# Altium PCB PCB1.PcbDoc (part 2 of 2)
Units mm, origin at the board's own origin, x right, y up, seen from the top; angles counter-clockwise.
Board outline 39 x 39 mm, 4 copper layers (Top Layer, Mid Layer 1, Mid Layer 2, Bottom Layer), stack 1.57 mm thick; 85 components, 70 nets, 394 pads, 166 vias.
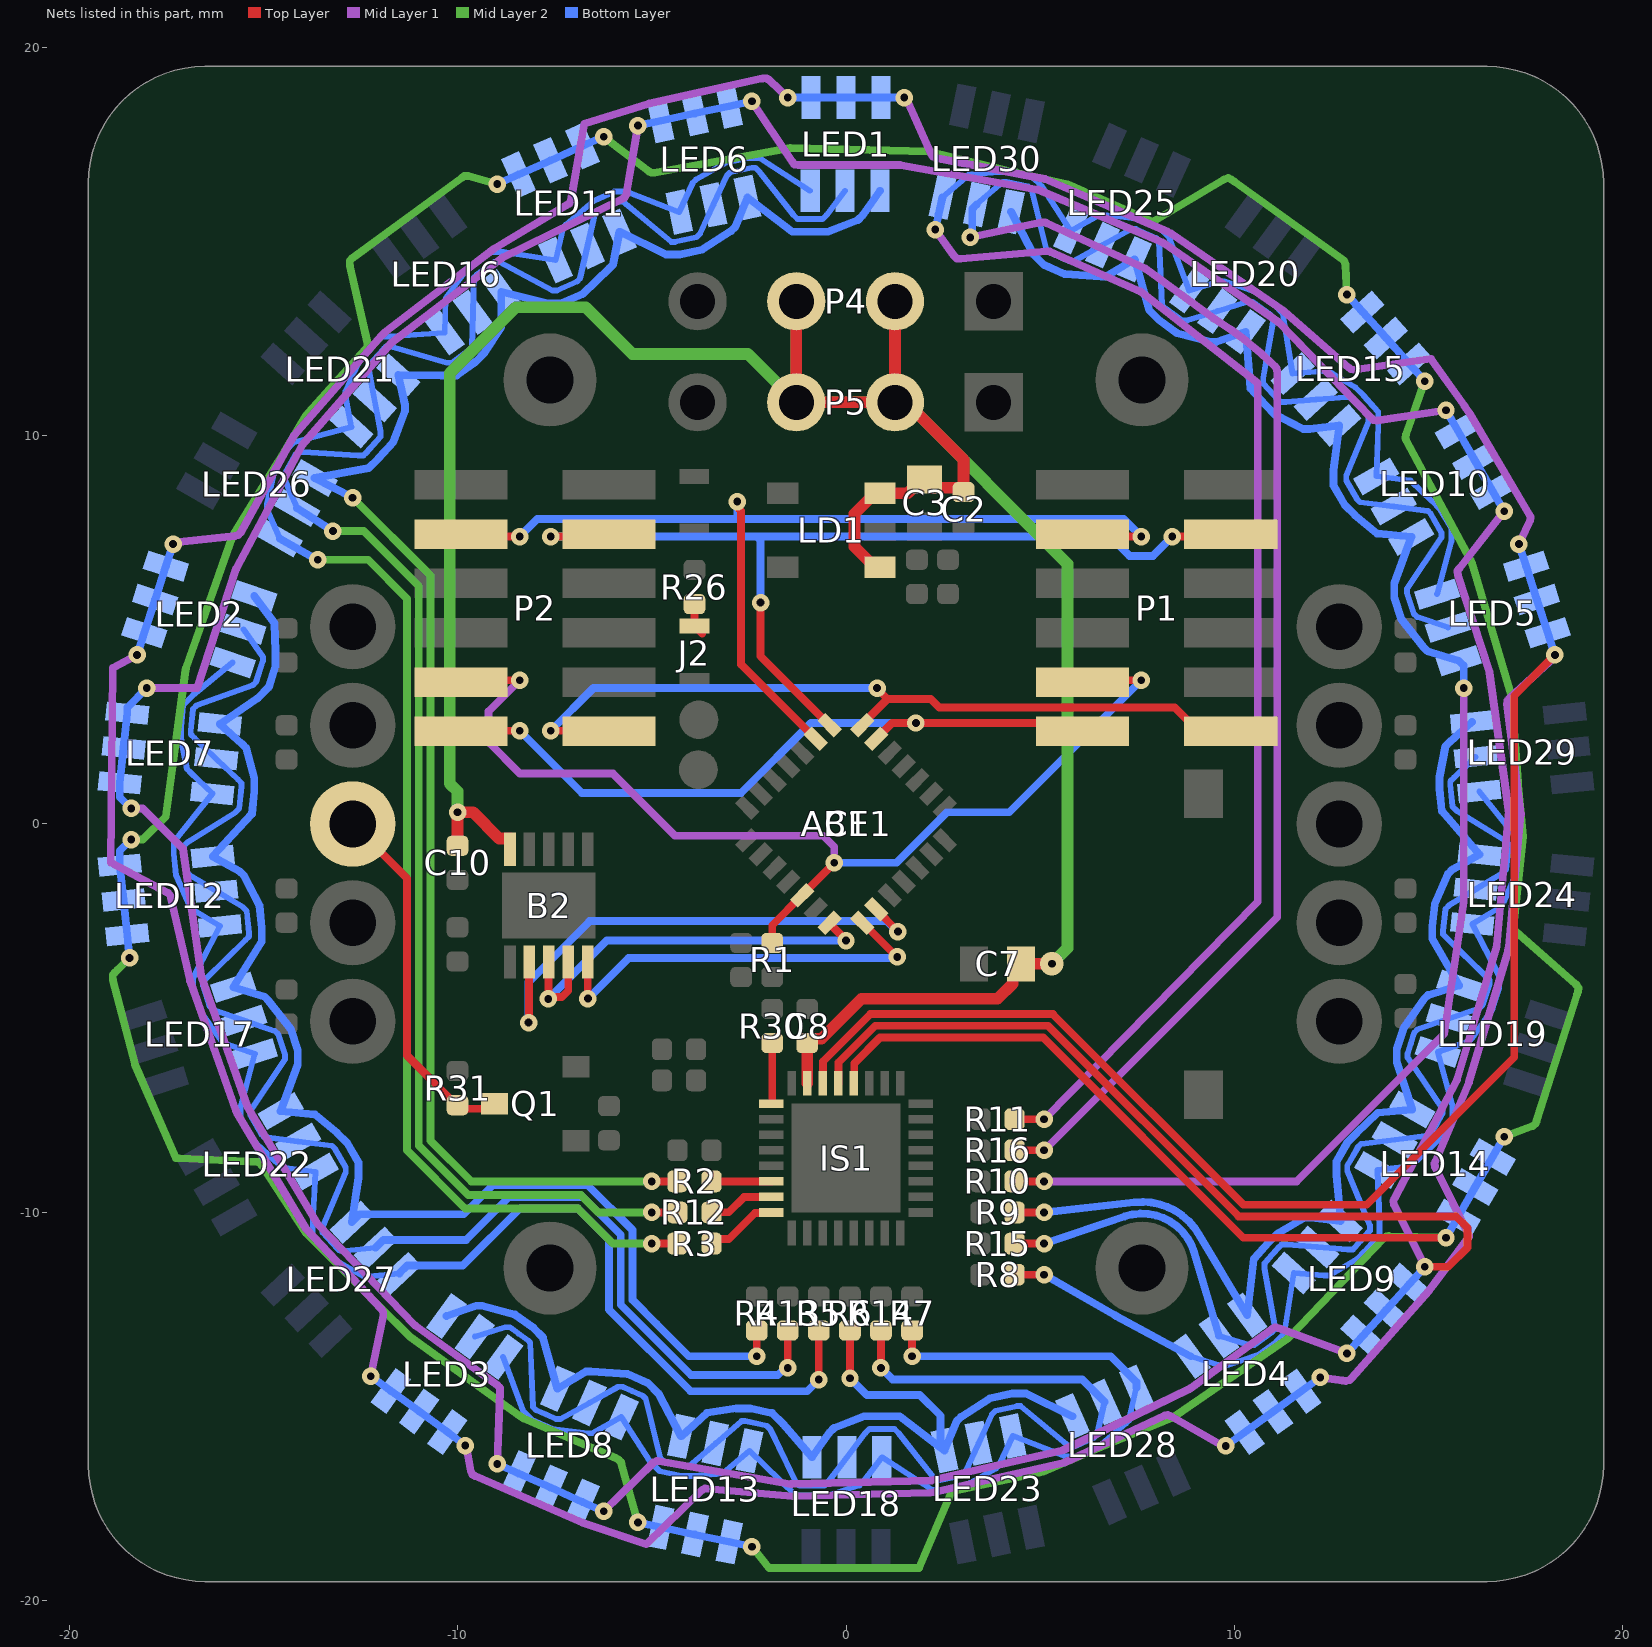
[diagram p4: the nets of this part, all layers, seen from the top]

## Via types
v1: diameter 0.45, hole 0.2, Top Layer to Bottom Layer, 155 vias
v2: diameter 5.8, hole 3.5, Top Layer to Bottom Layer, 4 vias
v3: diameter 0.5, hole 0.2, Top Layer to Bottom Layer, 4 vias
v4: diameter 0.7, hole 0.5, Top Layer to Bottom Layer, 2 vias
v5: diameter 0.6, hole 0.2, Top Layer to Bottom Layer, 1 vias

## Nets (pads, with @x,y where several pads share a name; then routed paths per layer and width w, separated by ;. In a path a pad name is that pad's centre, name@x,y a point inside that pad or via, vN(x,y) a via of type N, cw(c..) or ccw(c..) an arc to the next point about the centre after c; other vN are vias at no path point) (continued)
NetIS1_20: IS1.20 LED11.1 LED11.3 LED11.5 LED12.1 LED12.3 LED12.5 LED13.1 LED13.3 LED13.5 LED14.1 LED14.3 LED14.5 LED15.1 LED15.3 LED15.5 | length 141.2
  Top Layer w0.2: IS1.20@0.2,-6.675 0.21,-6.665 0.21,-6.163 0.877,-5.497 5.076,-5.497 10.229,-10.649 v1(15.445,-10.649)
  Mid Layer 2 w0.2: v1(-18.441,-3.446) -18.759,-3.761 -18.818,-3.819 -18.877,-3.878 -18.877,-3.987 -18.871,-4.012 -18.3,-6.2 -18.294,-6.214 -17.248,-8.602 -17.171,-8.606 -15.125,-8.699 -15.055,-8.768 -15.044,-8.785 -13.902,-10.525 -12.013,-12.414 -11.225,-13.202 -8.372,-15.255 -8.298,-15.302 -5.913,-16.327 -5.846,-16.371 -5.794,-16.423 -5.779,-16.473 v1(-5.355,-17.98) ; v1(-18.4,-0.4) -18.1,-0.4 -17.51,0.19 -17.002,3.952 -16.99,4.016 -15.802,7.385 -15.769,7.445 -14.62,9.312 ; -14.62,9.313 -14.591,9.361 -13.902,10.516 -13.839,10.588 -12.369,12.223 -12.318,12.28 -12.318,12.379 -12.771,14.372 -12.776,14.394 -12.776,14.499 -12.706,14.569 -12.641,14.616 -9.878,16.643 -9.825,16.681 -9.733,16.681 v1(-8.976,16.473) ; v1@-6.238,17.692 -5.084,16.807 -5.069,16.796 -5.01,16.766 -4.931,16.766 -1.498,17.389 -1.433,17.399 2.138,17.309 2.205,17.296 4.336,16.781 ; v1@-2.419,-18.601 -1.978,-19.153 1.876,-19.153 2.691,-17.253 2.749,-17.172 2.824,-17.156 4.974,-16.697 5.067,-16.676 6.304,-16.146 6.355,-16.125 ; 4.337,16.781 4.391,16.768 5.703,16.47 5.791,16.432 7.8,15.54 7.87,15.509 7.964,15.539 9.719,16.586 9.739,16.597 9.839,16.63 9.926,16.585 9.992,16.538 12.773,14.536 12.826,14.498 12.855,14.41 v1@12.89,13.626 ; 6.356,-16.125 8.383,-15.289 8.444,-15.26 11.386,-13.233 11.433,-13.188 13.844,-10.666 13.908,-10.619 13.974,-10.609 13.992,-10.609 15.445,-10.646 v1@15.446,-10.646 ; v1@14.898,11.4 14.413,10.029 14.407,10.011 14.397,9.946 14.422,9.87 16.075,6.799 16.104,6.74 17.123,3.316 17.131,3.248 17.3,1.062 ; v1@16.943,-8.049 17.677,-7.773 17.752,-7.718 17.772,-7.656 18.816,-4.392 18.841,-4.315 18.856,-4.218 18.794,-4.133 18.778,-4.118 17.24,-2.772 17.181,-2.692 17.189,-2.616 17.417,-0.43 17.426,-0.334 17.304,1.006 17.3,1.061
  Bottom Layer w0.2: v1(-18.441,-3.446) LED12.1@-18.503,-2.85 LED12.3@-18.598,-1.955 LED12.5@-18.692,-1.06 -18.692,-0.692 v1(-18.4,-0.4) ; v1(-8.976,16.473) LED11.1@-8.428,16.717 LED11.3@-7.606,17.083 LED11.5@-6.784,17.449 v1(-6.236,17.693) ; v1(-5.355,-17.98) LED13.5@-4.768,-18.104 LED13.3@-3.888,-18.291 LED13.1@-3.008,-18.478 v1(-2.421,-18.603) ; v1(12.893,13.627) LED15.1@13.295,13.182 LED15.3@13.897,12.513 LED15.5@14.499,11.844 v1(14.901,11.398) ; v1(15.445,-10.649) LED14.5@15.745,-10.129 LED14.3@16.195,-9.35 LED14.1@16.645,-8.571 v1(16.945,-8.051)
NetIS1_21: IS1.21 LED6.1 LED6.3 LED6.5 LED7.1 LED7.3 LED7.5 LED8.1 LED8.3 LED8.5 LED9.1 LED9.3 LED9.5 LED10.1 LED10.3 LED10.5 | length 140
  Top Layer w0.2: IS1.21@-0.2,-6.675 -0.19,-6.665 -0.19,-6.137 0.752,-5.195 5.201,-5.195 10.106,-10.1 15.7,-10.1 16,-10.4 16,-10.9 15.502,-11.398 v1(14.9,-11.398)
  Mid Layer 1 w0.2: v1(-18.4,0.4) -18.1,0.4 -17.067,-0.633 -16.6,-3.9 -16.593,-3.919 -15.4,-7.3 -15.39,-7.317 -13.6,-10.3 -13.584,-10.316 -11.111,-12.889 -11.098,-12.901 -11.086,-12.91 -8.974,-14.446 -8.904,-14.516 -8.904,-14.603 -8.904,-14.607 v1(-8.976,-16.473) ; v1(-18,3.5) -16.698,3.5 -15.704,6.554 -15.699,6.569 -15.691,6.584 -14.009,9.732 -13.998,9.751 -11.715,12.375 -11.702,12.39 -8.855,14.57 -8.839,14.582 -5.757,16.094 -5.697,16.124 -5.653,16.21 v1(-5.355,17.979) ; v1(-6.236,-17.693) -4.955,-16.437 -4.868,-16.393 -4.803,-16.404 -1.421,-16.993 -1.401,-16.992 2.184,-16.902 2.204,-16.898 5.593,-16.117 5.614,-16.107 8.824,-14.55 8.84,-14.542 8.853,-14.533 10.966,-12.999 11.054,-12.954 11.137,-12.981 11.14,-12.982 v1(12.893,-13.627) ; v1(-2.421,18.603) -1.382,17.051 -1.38,17.048 -1.329,16.977 -1.232,16.962 1.38,16.961 1.396,16.961 1.413,16.958 4.926,16.331 4.948,16.327 8.149,14.966 8.168,14.958 11.121,12.924 11.137,12.912 13.528,10.448 13.574,10.401 13.67,10.385 v1(15.445,10.649) ; v1(14.9,-11.398) 14.101,-9.792 14.086,-9.696 14.117,-9.637 15.722,-6.602 15.728,-6.583 16.75,-3.146 16.751,-3.126 17.057,0.339 17.054,0.361 16.565,3.896 16.562,3.914 16.557,3.929 15.751,6.413 15.736,6.51 15.787,6.58 15.789,6.583 v1(16.945,8.051)
  Bottom Layer w0.2: v1(-18.4,0.4) -18.692,0.692 LED7.1@-18.692,1.06 LED7.3@-18.598,1.955 LED7.5@-18.503,2.85 -18.503,2.997 v1(-18,3.5) ; v1(-8.976,-16.473) LED8.5@-8.428,-16.717 LED8.3@-7.606,-17.083 LED8.1@-6.784,-17.449 v1(-6.236,-17.693) ; v1(-5.355,17.979) LED6.1@-4.768,18.104 LED6.3@-3.888,18.291 LED6.5@-3.008,18.478 v1(-2.421,18.603) ; v1(12.893,-13.627) LED9.5@13.295,-13.182 LED9.3@13.897,-12.513 LED9.1@14.499,-11.844 v1(14.9,-11.398) ; v1(15.445,10.649) LED10.1@15.745,10.129 LED10.3@16.195,9.35 LED10.5@16.645,8.571 v1(16.945,8.051)
NetIS1_22: IS1.22 LED1.1 LED1.3 LED1.5 LED2.1 LED2.3 LED2.5 LED3.1 LED3.3 LED3.5 LED4.1 LED4.3 LED4.5 LED5.1 LED5.3 LED5.5 | length 156.2
  Top Layer w0.2: IS1.22@-0.6,-6.675 -0.59,-6.665 -0.59,-6.11 0.627,-4.894 5.326,-4.894 10.231,-9.798 13.402,-9.798 17.2,-6 17.2,3.304 v1(18.248,4.352)
  Mid Layer 1 w0.2: v1(-18.248,4.352) -18.875,4.013 -18.927,-0.996 -17.454,-1.771 -17.392,-1.833 -17.379,-1.889 -16.884,-4.042 -15.702,-7.384 -15.662,-7.465 -13.902,-10.421 -11.946,-12.509 -11.91,-12.58 -11.91,-12.649 -11.914,-12.669 v1(-12.236,-14.213) ; v1@-17.299,7.244 -15.73,7.416 -15.71,7.419 -15.645,7.44 -15.588,7.496 -14.207,10.001 -11.939,12.588 -11.874,12.651 -9.062,14.809 -7.167,15.945 -7.118,15.975 -7.078,16.053 -6.74,18.021 -5.076,18.543 cw(c-5.016,18.352) -5.059,18.547 -2.145,19.192 cw(c-2.101,18.997) -1.964,19.142 ; v1@-9.778,-16.01 -9.673,-16.584 -9.659,-16.663 -9.613,-16.753 -9.547,-16.781 -6.789,-17.982 -6.782,-17.985 -6.553,-18.065 -5.14,-18.541 -3.709,-17.147 -3.631,-17.108 -3.574,-17.113 -1.373,-17.307 2.17,-17.215 2.26,-17.202 5.616,-16.442 8.205,-15.227 8.284,-15.215 8.349,-15.236 8.367,-15.246 v1@9.737,-16.029 ; -1.963,19.141 v1(-1.5,18.7) ; v1@1.544,18.691 2.192,17.252 2.201,17.234 2.241,17.178 2.312,17.142 5.121,16.602 8.283,15.245 8.363,15.203 11.284,13.195 12.95,11.744 12.993,11.706 13.08,11.692 15.056,11.979 15.92,10.763 16.058,10.563 16.062,10.557 17.588,7.965 17.624,7.903 17.608,7.803 17.574,7.731 v1(17.321,7.205) ; v1(12.205,-14.247) 12.784,-14.324 12.863,-14.335 12.962,-14.319 13.01,-14.265 15.004,-12.014 15.008,-12.008 15.156,-11.815 16.045,-10.618 15.162,-8.826 15.148,-8.74 15.171,-8.687 16.036,-6.654 17.043,-3.256 17.058,-3.166 17.372,0.26 17.017,3.098 17.03,3.177 17.07,3.232 17.085,3.246 v1@18.253,4.307
  Bottom Layer w0.2: v1(-18.248,4.352) LED2.1@-18.063,4.923 LED2.3@-17.785,5.779 LED2.5@-17.507,6.635 v1(-17.321,7.205) ; v1(-12.236,-14.213) LED3.5@-11.716,-14.592 LED3.3@-10.988,-15.121 LED3.1@-10.26,-15.65 v1(-9.8,-16) ; v1(-1.5,18.7) LED1.1@-0.9,18.7 LED1.3@0,18.7 LED1.5@0.9,18.7 v1(1.5,18.7) ; v1(9.778,-16.01) LED4.5@10.263,-15.658 LED4.3@10.992,-15.129 LED4.1@11.72,-14.6 v1(12.205,-14.247) ; v1(17.321,7.205) LED5.1@17.507,6.635 LED5.3@17.785,5.779 LED5.5@18.063,4.923 v1(18.248,4.352)
NetIS1_25: IS1.25 R30.1 | length 1.6
  Top Layer w0.2: IS1.25@-1.925,-7.2 -1.91,-7.2 -1.9,-7.19 R30.1@-1.9,-5.64
NetIS1_30: IS1.30 R2.1 | length 1.5
  Top Layer w0.2: R2.1@-3.46,-9.2 IS1.30@-1.925,-9.2
NetIS1_31: IS1.31 R12.1 | length 1.7
  Top Layer w0.2: R12.1@-3.46,-10 -3.454,-9.994 -3.017,-9.994 -2.623,-9.6 IS1.31@-1.925,-9.6
NetIS1_32: IS1.32 R3.1 | length 1.9
  Top Layer w0.2: R3.1@-3.46,-10.8 -3.346,-10.686 -3.016,-10.686 -2.34,-10.01 -1.935,-10.01 IS1.32@-1.925,-10
NetJ2_2: J2.2 R26.1 | length 1.6
  Top Layer w0.2: J2.2@-3.9,5.097 J2.2@-3.9,5.1 ; -3.7,4.9 J2.2@-3.9,5.1 ; J2.2@-3.9,5.1 R26.1@-3.9,5.66 -3.9,5.76 J2.2@-3.9,5.1
NetLED1_2: LED1.2 LED6.2 LED11.2 LED16.2 LED21.2 LED26.2 R3.2 | length 47.3
  Top Layer w0.2: v1(-5,-10.8) R3.2@-4.34,-10.8
  Mid Layer 2 w0.2: v1(-13.6,6.8) -12.3,6.8 -11.3,5.8 -11.3,-8.4 -9.8,-9.9 -6.9,-9.9 -6,-10.8 v1(-5,-10.8)
  Bottom Layer w0.15: LED26.2@-14.579,7.349 -14.907,8.114 -14.907,8.234 -14.708,9.118 -14.423,9.612 -14.207,9.827 LED21.2@-12.732,10.219 -12.883,10.997 -12.883,11.138 -12.532,11.911 -12.149,12.337 -11.947,12.539 LED16.2@-10.329,12.643 -10.303,13.543 -9.827,14.177 -9.618,14.386 -9.156,14.721 -8.817,14.721 LED11.2@-7.475,14.515 -7.281,15.355 -7.206,15.429 -6.488,16.047 -5.968,16.279 -5.648,16.279 LED6.2@-4.294,15.751 -3.949,16.498 -3.86,16.586 -3.084,17.025 -2.526,17.144 -2.226,17.144 LED1.2@-0.925,16.3
  Bottom Layer w0.2: LED26.2@-14.579,7.349 v1(-13.6,6.8)
NetLED1_4: LED1.4 LED6.4 LED11.4 LED16.4 LED21.4 LED26.4 R12.2 | length 50.1
  Top Layer w0.2: v1(-5,-10) R12.2@-4.34,-10
  Mid Layer 2 w0.2: v1(-13.207,7.541) -12.414,7.541 -11.675,6.802 -10.998,6.125 -10.998,-8.275 -9.723,-9.55 -6.823,-9.55 -6.373,-10 v1(-5,-10)
  Bottom Layer w0.15: LED26.4@-14.129,8.128 -14.457,8.893 -14.457,9.014 -14.171,9.508 -14.103,9.576 -13.983,9.576 -12.559,9.489 -12.418,9.489 -12.363,9.544 -11.98,9.969 -11.98,10.11 LED21.4@-12.13,10.888 -12.28,11.666 -12.28,11.807 -11.897,12.232 -11.842,12.287 -11.701,12.287 -10.281,11.875 -10.151,11.875 -9.689,12.211 -9.627,12.272 LED16.4@-9.601,13.172 -9.575,14.072 -9.514,14.134 -9.051,14.47 -8.921,14.47 -7.553,13.734 -7.442,13.734 -6.921,13.966 -6.846,14.041 LED11.4@-6.653,14.881 -6.459,15.721 -6.384,15.795 -5.863,16.027 -5.753,16.027 -4.497,14.985 -4.405,14.985 -3.847,15.104 -3.758,15.192 LED6.4@-3.413,15.939 -3.069,16.685 -2.98,16.774 -2.421,16.892 -2.33,16.892 -2.241,16.804 -1.352,15.677 -1.248,15.573 -0.602,15.573 -0.498,15.677 LED1.4@-0.025,16.3
  Bottom Layer w0.2: LED26.4@-14.129,8.128 v1(-13.207,7.541)
NetLED1_6: LED1.6 LED6.6 LED11.6 LED16.6 LED21.6 LED26.6 R2.2 | length 45.9
  Top Layer w0.2: v1(-5,-9.2) R2.2@-4.34,-9.2
  Mid Layer 2 w0.2: v1(-12.7,8.4) -10.697,6.397 -10.697,-8.15 -9.647,-9.2 v1(-5,-9.2)
  Bottom Layer w0.2: v1(-12.7,8.4) LED26.6@-13.679,8.908 -12.282,9.162 -12.043,9.402 -11.653,9.835 -11.352,10.629 -11.352,10.79 LED21.6@-11.528,11.557 -10.417,11.548 -10.018,11.548 -9.547,11.89 -9.3,12.138 -8.874,12.791 LED16.6@-8.873,13.701 -7.688,13.407 -7.312,13.407 -6.782,13.643 -6.084,14.311 -5.999,14.396 LED11.6@-5.83,15.247 -4.632,14.658 -4.278,14.658 -3.71,14.779 -2.954,15.268 -2.853,15.369 LED6.6@-2.533,16.126 -1.383,15.247 -0.467,15.247 0.309,15.548 0.427,15.666 LED1.6@0.875,16.3
NetLED2_2: LED2.2 LED7.2 LED12.2 LED17.2 LED22.2 LED27.2 R5.2 | length 37.2
  Top Layer w0.2: v1(-0.7,-14.3) R5.2@-0.7,-13.04
  Bottom Layer w0.15: LED2.2@-15.788,4.157 -16.817,3.308 -17.061,3.065 -17.121,2.496 -17.121,2.206 -16.963,1.415 -16.867,1.319 LED7.2@-16.307,0.784 -17.303,-0.465 -17.303,-0.756 -17.244,-1.325 -16.898,-2.115 -16.802,-2.211 LED12.2@-16.114,-2.624 -16.801,-3.957 -16.801,-4.266 -16.625,-4.809 -16.095,-5.561 -16.014,-5.642 LED17.2@-15.217,-5.914 -15.583,-7.273 -15.583,-7.602 -15.298,-8.096 -15.082,-8.312 -14.528,-8.84 LED22.2@-13.654,-8.951 -13.725,-10.266 -13.725,-10.617 -13.334,-11.036 -13.133,-11.238 -12.415,-11.644 -12.273,-11.644 LED27.2@-11.497,-11.568
  Bottom Layer w0.2: LED27.2@-11.497,-11.568 -11.292,-11.363 -9.863,-11.363 -8.4,-9.9 -6.9,-9.9 -6.1,-10.7 -6.1,-12.5 -4,-14.6 -1,-14.6 v1(-0.7,-14.3)
NetLED2_4: LED2.4 LED7.4 LED12.4 LED17.4 LED22.4 LED27.4 R13.2 | length 39.6
  Top Layer w0.2: v1(-1.5,-14) R13.2@-1.5,-13.04
  Bottom Layer w0.15: LED2.4@-15.51,5.013 -15.011,4.298 -15.011,4.197 -15.187,3.655 -15.269,3.573 -16.713,3.057 -16.809,2.961 -16.869,2.392 -16.869,2.31 -16.773,2.214 LED7.4@-16.213,1.679 -15.654,1.144 -15.558,1.048 -15.558,0.966 -15.617,0.397 -15.713,0.301 -16.956,-0.473 -17.052,-0.569 -17.052,-0.652 -16.992,-1.22 -16.896,-1.316 LED12.4@-16.208,-1.729 -15.52,-2.141 -15.424,-2.237 -15.364,-2.806 -15.364,-2.888 -15.46,-2.984 -16.468,-3.979 -16.55,-4.061 -16.55,-4.162 -16.373,-4.705 -16.292,-4.786 LED17.4@-15.495,-5.058 -14.698,-5.33 -14.616,-5.412 -14.44,-5.954 -14.44,-6.055 -15.332,-7.378 -15.332,-7.498 -15.046,-7.992 -14.978,-8.06 LED22.4@-14.104,-8.172 -13.229,-8.283 -13.161,-8.351 -12.876,-8.845 -12.876,-8.966 -13.473,-10.371 -13.473,-10.513 -13.083,-10.932 -13.029,-10.986 -12.886,-10.986 LED27.4@-12.11,-10.91
  Bottom Layer w0.2: LED27.4@-12.11,-10.91 -11.906,-10.705 -9.774,-10.705 -8.667,-9.598 -6.775,-9.598 -5.798,-10.575 -5.798,-12.375 -3.987,-14.186 -1.754,-14.186 -1.568,-14 v1(-1.5,-14)
NetLED2_6: LED2.6 LED7.6 LED12.6 LED17.6 LED22.6 LED27.6 R4.2 | length 35
  Top Layer w0.2: v1(-2.3,-13.7) R4.2@-2.3,-13.04
  Bottom Layer w0.2: LED2.6@-15.232,5.869 -14.708,5.165 -14.685,4.433 -14.685,4.068 -14.864,3.516 -15.134,3.246 LED7.6@-16.119,2.574 -15.548,2.063 -15.439,1.954 -15.231,1.183 -15.231,0.84 -15.292,0.261 LED12.6@-16.302,-0.834 -15.604,-1.221 -15.494,-1.33 -15.099,-2.101 -15.038,-2.679 -15.038,-3.023 LED17.6@-15.773,-4.202 -14.965,-4.449 -14.872,-4.542 -14.292,-5.273 -14.113,-5.825 -14.113,-6.19 LED22.6@-14.554,-7.392 -13.669,-7.479 -13.094,-7.956 -12.839,-8.211 -12.549,-8.714 -12.549,-9.101 LED27.6@-12.724,-10.251 -12.519,-10.047 -9.84,-10.047 -9.09,-9.297 -6.65,-9.297 -5.497,-10.45 -5.497,-12.25 -4.873,-12.873 -4.047,-13.7 v1(-2.3,-13.7)
NetLED3_2: LED3.2 LED8.2 LED13.2 LED18.2 LED23.2 LED28.2 R7.2 | length 28.2
  Top Layer w0.2: v1(1.7,-13.7) R7.2@1.7,-13.04
  Bottom Layer w0.15: LED3.2@-8.829,-13.723 -8.309,-15.113 -8.087,-15.335 -7.566,-15.567 -6.64,-15.682 -6.529,-15.682 LED8.2@-5.785,-15.267 -5.032,-16.425 -4.796,-16.661 -4.237,-16.78 -3.937,-16.78 -3.161,-16.716 LED13.2@-2.484,-16.136 -1.302,-17.278 -0.448,-17.278 0.348,-17.027 0.452,-16.923 LED18.2@0.925,-16.3 2.226,-17.144 2.526,-17.144 3.084,-17.025 3.86,-16.586 3.949,-16.498 LED23.2@4.294,-15.751 5.648,-16.279 5.968,-16.279 6.488,-16.047 7.206,-15.429 7.281,-15.355 LED28.2@7.475,-14.515
  Bottom Layer w0.2: v1(1.7,-13.7) 6.812,-13.7 7.475,-14.363 LED28.2@7.475,-14.515
NetLED3_4: LED3.4 LED8.4 LED13.4 LED18.4 LED23.4 LED28.4 R14.2 | length 31.5
  Top Layer w0.2: v1(0.9,-14) R14.2@0.9,-13.04
  Bottom Layer w0.15: LED3.4@-9.557,-13.194 -8.781,-12.955 -8.65,-12.955 -8.435,-13.111 -8.188,-13.291 -8.127,-13.352 -8.058,-15.009 -7.983,-15.084 -7.732,-15.196 -7.462,-15.316 -7.351,-15.316 LED8.4@-6.607,-14.901 -5.863,-14.486 -5.752,-14.486 -5.509,-14.595 -5.231,-14.718 -5.156,-14.793 -4.78,-16.321 -4.692,-16.41 -4.133,-16.528 -4.042,-16.528 LED13.4@-3.365,-15.949 -2.688,-15.37 -2.596,-15.37 -2.266,-15.44 -2.037,-15.488 -1.949,-15.577 -1.302,-16.923 -1.198,-17.027 -0.552,-17.027 -0.448,-16.923 LED18.4@0.025,-16.3 0.498,-15.677 0.602,-15.573 1.248,-15.573 1.352,-15.677 2.241,-16.804 2.33,-16.892 2.421,-16.892 2.98,-16.774 3.069,-16.685 LED23.4@3.413,-15.939 3.758,-15.192 3.847,-15.104 4.405,-14.985 4.497,-14.985 5.753,-16.027 5.863,-16.027 6.384,-15.795 6.459,-15.721 LED28.4@6.653,-14.881
  Bottom Layer w0.2: v1(0.9,-14) 1.2,-14.3 6.079,-14.3 6.653,-14.873 LED28.4@6.653,-14.881
NetLED3_6: LED3.6 LED8.6 LED13.6 LED18.6 LED23.6 LED28.6 R6.2 | length 25.6
  Top Layer w0.2: R6.2@0.1,-13.04 0.103,-13.043 v1(0.103,-14.266)
  Bottom Layer w0.2: LED3.6@-10.285,-12.665 -9.519,-12.401 -9.37,-12.401 -8.517,-12.628 -8.047,-12.97 -7.8,-13.217 LED8.6@-7.429,-14.535 -6.695,-14.095 -6.569,-14.095 -5.622,-14.16 -5.092,-14.396 -4.829,-14.658 LED13.6@-4.245,-15.762 -3.578,-15.157 -2.823,-15.043 -2.468,-15.043 -1.9,-15.164 -1.622,-15.442 LED18.6@-0.875,-16.3 -0.427,-15.666 -0.309,-15.548 0.467,-15.247 1.383,-15.247 2.425,-16.043 LED23.6@2.533,-16.126 ; v1(0.103,-14.266) 0.537,-14.7 1.9,-14.7 2.436,-15.236 2.436,-16.028 LED23.6@2.533,-16.126 ; LED28.6@5.83,-15.247 4.632,-14.658 4.278,-14.658 3.71,-14.779 2.954,-15.268 2.853,-15.369 LED23.6@2.533,-16.126
NetLED4_2: LED4.2 LED9.2 LED14.2 LED19.2 LED24.2 LED29.2 R9.2 | length 27.9
  Top Layer w0.2: R9.2@4.34,-10 v1(5.1,-10)
  Bottom Layer w0.2: v1(5.1,-10) 7.428,-9.738 cw(c7.62,-11.43) 9.083,-10.558 LED4.2@10.329,-12.643 10.499,-11.192 10.882,-10.767 11.099,-10.55 11.805,-10.133 11.966,-10.133 LED9.2@12.732,-10.219 12.624,-9.037 12.624,-8.687 12.909,-8.193 13.14,-7.963 13.694,-7.435 LED14.2@14.579,-7.349 14.178,-6.125 14.178,-5.794 14.355,-5.252 14.887,-4.497 14.981,-4.404 LED19.2@15.788,-4.157 15.093,-2.953 15.093,-2.641 15.153,-2.073 15.499,-1.281 15.609,-1.171 LED24.2@16.307,-0.784 15.336,0.332 15.276,0.901 15.276,1.212 15.433,2.003 15.543,2.113 LED29.2@16.114,2.624
NetLED4_4: LED4.4 LED9.4 LED14.4 LED19.4 LED24.4 LED29.4 R15.2 | length 31.9
  Top Layer w0.2: R15.2@4.34,-10.8 v1(5.1,-10.8)
  Bottom Layer w0.15: LED4.4@9.601,-13.172 10.377,-13.412 10.508,-13.412 10.829,-13.178 10.97,-13.076 11.031,-13.014 11.031,-12.884 10.775,-11.448 10.775,-11.307 10.974,-11.086 11.158,-10.882 11.213,-10.827 11.354,-10.827 LED9.4@12.13,-10.888 12.906,-10.95 13.047,-10.95 13.102,-10.895 13.243,-10.738 13.485,-10.469 13.485,-10.329 12.901,-8.922 12.901,-8.802 12.995,-8.639 13.186,-8.308 13.254,-8.24 LED14.4@14.129,-8.128 15.003,-8.017 15.071,-7.949 15.18,-7.761 15.357,-7.455 15.357,-7.334 14.455,-6.01 14.455,-5.909 14.54,-5.648 14.631,-5.367 14.713,-5.285 LED19.4@15.51,-5.013 16.307,-4.742 16.389,-4.66 16.565,-4.117 16.565,-4.016 16.483,-3.935 15.465,-2.934 15.37,-2.838 15.37,-2.756 15.429,-2.187 15.525,-2.091 LED24.4@16.213,-1.679 16.901,-1.267 16.997,-1.171 17.057,-0.602 17.057,-0.52 16.961,-0.424 15.708,0.351 15.612,0.447 15.552,1.015 15.552,1.098 15.648,1.194 LED29.4@16.208,1.729
  Bottom Layer w0.2: v1(5.1,-10.8) 7.171,-10.102 cw(c7.62,-11.43) 8.964,-11.032 LED4.4@9.601,-13.172
NetLED4_6: LED4.6 LED9.6 LED14.6 LED19.6 LED24.6 LED29.6 R8.2 | length 26.4
  Top Layer w0.2: R8.2@4.34,-11.6 v1(5.1,-11.6)
  Bottom Layer w0.15: LED4.6@8.873,-13.701 9.649,-13.941 9.78,-13.941 10.612,-13.663 11.074,-13.328 11.283,-13.119 LED9.6@11.528,-11.557 12.304,-11.619 12.445,-11.619 13.151,-11.201 13.353,-10.999 13.736,-10.574 13.736,-10.224 LED14.6@13.679,-8.908 14.553,-8.796 15.107,-8.269 15.323,-8.053 15.608,-7.559 15.608,-7.23 LED19.6@15.232,-5.869 16.029,-5.598 16.111,-5.516 16.64,-4.764 16.817,-4.222 16.817,-3.912 LED24.6@16.119,-2.574 16.807,-2.162 16.903,-2.066 17.249,-1.275 17.309,-0.706 17.309,-0.415 LED29.6@16.302,0.834
  Bottom Layer w0.2: v1(5.1,-11.6) 6.922,-12.646 ccw(c7.62,-11.43) 6.953,-12.663 LED4.6@8.873,-13.701
NetLED5_2: LED5.2 LED10.2 LED15.2 LED20.2 LED25.2 LED30.2 R11.2 | length 53.8
  Top Layer w0.2: R11.2@4.34,-7.6 v1(5.1,-7.6)
  Mid Layer 1 w0.2: v1(2.3,15.3) 2.776,14.634 2.785,14.621 2.856,14.55 2.947,14.55 5.176,14.744 5.227,14.744 5.265,14.727 7.577,13.71 ; v1(5.1,-7.6) 10.6,-1.996 10.6,11.343 7.62,13.684
  Bottom Layer w0.15: LED30.2@2.484,16.136 3.161,16.716 3.937,16.78 4.237,16.78 4.796,16.661 5.032,16.425 LED25.2@5.785,15.267 6.529,15.682 6.64,15.682 7.566,15.567 8.087,15.335 8.309,15.113 LED20.2@8.833,13.731 9.609,13.97 9.739,13.97 10.571,13.693 11.034,13.357 11.243,13.148 LED15.2@11.494,11.594 12.27,11.656 12.411,11.656 13.118,11.239 13.32,11.036 13.703,10.611 13.703,10.261 LED10.2@13.654,8.951 14.528,8.84 15.082,8.312 15.298,8.096 15.583,7.602 15.583,7.273 LED5.2@15.216,5.917
  Bottom Layer w0.2: v1(2.3,15.3) 2.384,15.697 LED30.2@2.484,16.136
NetLED5_4: LED5.4 LED10.4 LED15.4 LED20.4 LED25.4 LED30.4 R16.2 | length 57.8
  Top Layer w0.2: R16.2@4.34,-8.4 v1(5.1,-8.4)
  Mid Layer 1 w0.2: v1(3.2,15.1) 5.035,15.486 cw(c5.076,15.291) 5.16,15.472 7.682,14.308 cw(c7.598,14.127) 7.716,14.288 9.481,13.006 ; v1(5.1,-8.4) 11.1,-2.4 11.1,11.642 ccw(c10.9,11.642) 11.041,11.783 ccw(c4.79,5.415) 9.481,13.006 ; 9.459,13.014 9.481,13.006
  Bottom Layer w0.15: LED30.4@3.365,15.949 4.042,16.528 4.133,16.528 4.692,16.41 4.78,16.321 5.156,14.793 5.231,14.718 5.752,14.486 5.863,14.486 LED25.4@6.607,14.901 7.351,15.316 7.462,15.316 7.983,15.084 8.058,15.009 8.13,13.36 8.192,13.298 8.654,12.962 8.785,12.962 LED20.4@9.561,13.202 10.337,13.441 10.467,13.441 10.929,13.105 10.991,13.044 10.991,12.913 10.742,11.485 10.742,11.344 11.125,10.919 11.18,10.864 11.321,10.864 LED15.4@12.097,10.925 12.872,10.987 13.013,10.987 13.068,10.932 13.451,10.507 13.451,10.366 12.876,8.966 12.876,8.845 13.161,8.351 13.229,8.283 LED10.4@14.104,8.172 14.978,8.06 15.046,7.992 15.332,7.498 15.332,7.378 14.439,6.058 14.439,5.957 14.616,5.414 14.697,5.332 LED5.4@15.494,5.061
  Bottom Layer w0.2: v1(3.2,15.1) 3.248,15.148 3.248,15.832 LED30.4@3.365,15.949
NetLED5_6: LED5.6 LED10.6 LED15.6 LED20.6 LED25.6 LED30.6 R10.2 | length 43
  Top Layer w0.2: R10.2@4.34,-9.2 v1(5.1,-9.2)
  Mid Layer 1 w0.2: v1(5.1,-9.2) 11.6,-9.2 15.4,-5.4 15.9,-2 v1(15.9,3.5)
  Bottom Layer w0.2: LED30.6@4.245,15.762 4.829,14.658 5.092,14.396 5.622,14.16 6.569,14.095 6.695,14.095 LED25.6@7.429,14.535 7.804,13.224 8.051,12.977 8.521,12.636 9.374,12.408 9.523,12.408 LED20.6@10.289,12.673 10.415,11.21 10.805,10.777 11.044,10.537 11.772,10.17 11.932,10.17 LED15.6@12.699,10.257 12.549,9.101 12.549,8.714 12.839,8.211 13.094,7.956 13.669,7.479 LED10.6@14.554,7.392 14.113,6.193 14.113,5.828 14.292,5.276 14.872,4.545 14.965,4.451 LED5.6@15.773,4.205 15.9,4.077 v1(15.9,3.5)
R\E\S\E\T\: B1.5 P1.9 P2.9 R1.2 | length 28
  Top Layer w0.2: P2.9@-9.911,3.654 -9.865,3.7 v1(-8.4,3.7) ; R1.2@-1.9,-3.06 -1.9,-2.607 B1.5@-1.131,-1.838 -1.131,-1.835 -0.3,-1.004 v1(-0.3,-1) ; P1.9@6.091,3.654 6.137,3.7 v1(7.6,3.7)
  Mid Layer 1 w0.2: v1(-8.4,3.7) -9.2,2.9 -9.2,2.1 -8.4,1.3 -6,1.3 -4.4,-0.3 -0.587,-0.3 -0.3,-0.587 v1(-0.3,-1)
  Bottom Layer w0.2: v1(-0.3,-1) 1.3,-1 2.6,0.3 4.2,0.3 v1(7.6,3.7)
RS485_DE: B1.7 B2.3 B2.4 | length 11.2
  Top Layer w0.2: v1(-7.663,-4.503) v1@-7.656,-4.497 ; B2.3@-7.65,-3.55 -7.656,-3.556 v1@-7.656,-4.497 ; B2.4@-7.15,-3.55 -7.15,-4.288 -7.317,-4.455 -7.615,-4.455 v1@-7.656,-4.497 ; B1.7@-0.424,-2.546 -0.424,-2.561 0,-2.985 v1(0,-3)
  Bottom Layer w0.2: v1(-7.663,-4.503) -6.16,-3 v1(0,-3)
RS485_RX: B1.9 B2.2 | length 13.6
  Top Layer w0.2: v1@-8.17,-5.011 -8.16,-5 -8.16,-3.56 B2.2@-8.15,-3.55 ; B1.9@0.778,-2.192 0.778,-2.201 1.336,-2.76 v1(1.336,-2.769)
  Bottom Layer w0.2: v1(-8.17,-5.111) -8.17,-4.07 -6.6,-2.5 1.046,-2.5 1.315,-2.769 v1(1.336,-2.769)
RS485_TX: B1.8 B2.5 | length 10.6
  Top Layer w0.2: B2.5@-6.65,-3.55 -6.646,-3.554 -6.646,-4.491 v1(-6.642,-4.495) ; B1.8@0.424,-2.546 0.434,-2.546 1.31,-3.422 v1(1.32,-3.422)
  Bottom Layer w0.2: v1(-6.642,-4.495) -5.599,-3.452 1.289,-3.452 v1(1.32,-3.422)
S1: ACE1.3 Q1.3 R31.2 | length 9.4
  Top Layer w0.2: ACE1.3@-12.7,0 -11.3,-1.4 -11.3,-5.96 -10.11,-7.15 -10.02,-7.24 R31.2@-10,-7.24 ; R31.2@-10.072,-7.292 -10.004,-7.36 -10,-7.36 -9.97,-7.33 -9.08,-7.33 Q1.3@-9.05,-7.3
S\S\: B1.22 P1.4 P2.4 | length 25.1
  Top Layer w0.2: v1(-7.6,7.4) -6.165,7.4 P2.4@-6.101,7.464 ; v1(-2.2,5.7) -2.2,4.321 B1.22@-0.424,2.546 ; v1(8.4,7.4) 9.837,7.4 P1.4@9.901,7.464
  Bottom Layer w0.2: v1(-7.6,7.4) -2.3,7.4 ; v1(-2.2,5.7) -2.2,7.3 -2.3,7.4 ; v1(8.4,7.4) 7.9,6.9 7.3,6.9 6.8,7.4 -2.2,7.4 -2.3,7.4
SCK: B1.23 P1.3 P2.3 | length 26.8
  Top Layer w0.2: P2.3@-9.911,7.464 -9.847,7.4 v1(-8.4,7.4) ; v1(-2.8,8.3) -2.752,8.252 -2.752,8.11 -2.7,8.058 -2.7,4.107 -0.785,2.192 B1.23@-0.778,2.192 ; P1.3@6.091,7.464 6.155,7.4 v1(7.6,7.4)
  Bottom Layer w0.2: v1(-8.4,7.4) -7.948,7.852 -2.8,7.852 ; v1(-2.8,8.3) -2.8,7.852 ; v1(7.6,7.4) 7.148,7.852 -2.8,7.852
SWCLK: B1.21 P1.12 P2.12 | length 20.9
  Top Layer w0.2: v1(-7.6,2.4) -6.117,2.4 P2.12@-6.101,2.384 ; B1.21@0.424,2.546 0.424,2.574 1.068,3.218 2.182,3.218 2.4,3 8.465,3 9.081,2.384 P1.12@9.901,2.384 ; v1(0.8,3.5) 0.8,3.487 1.06,3.227
  Bottom Layer w0.2: v1(-7.6,2.4) -6.5,3.5 v1(0.8,3.5)
SWDIO: B1.20 P1.11 P2.11 | length 18.7
  Top Layer w0.2: P2.11@-9.911,2.384 -9.895,2.4 v1(-8.4,2.4) ; B1.20@0.778,2.192 1.186,2.6 v1(1.8,2.6) 5.875,2.6 P1.11@6.091,2.384
  Bottom Layer w0.2: v1(-8.4,2.4) -6.8,0.8 -2.7,0.8 -0.9,2.6 v1(1.8,2.6)
"VCC 5V": B2.10 C2.1 C3.1 C7.1 C8.1 C10.1 IS1.23 LD1.1 LD1.3 P4.2 P4.3 P5.2 P5.3 | length 73.7
  Top Layer w0.3: C10.1@-10,-0.56 v1(-10,0.3) -9.6,0.3 -8.925,-0.375 -8.65,-0.375 B2.10@-8.65,-0.65 ; P5.3@-1.28,10.62 P5.3@-1.28,10.854 ; P4.3@-1.28,13.454 P5.3@-1.28,10.854 ; IS1.23@-1,-6.675 C8.1@-1,-5.64 -0.89,-5.53 -0.63,-5.53 0.4,-4.5 3.9,-4.5 4.29,-4.11 4.29,-3.81 C7.1@4.5,-3.6 v5(5.3,-3.6) ; LD1.1@0.871,6.613 0.746,6.613 0.22,7.14 0.22,7.987 0.746,8.513 LD1.3@0.871,8.513 1.586,8.514 1.936,8.864 C3.1@2.026,8.864 2.236,8.653 2.896,8.653 3.006,8.543 C2.1@3.026,8.543 ; P4.2@1.26,13.454 P5.2@1.26,10.854 ; C2.1@3.046,8.543 C2.1@3.026,8.543 ; P5.3@-1.28,10.854 P5.2@1.26,10.854 ; P5.2@1.26,10.854 1.546,10.854 3.026,9.374 3.026,8.653 C2.1@3.026,8.543
  Mid Layer 2 w0.3: v1(-10,0.3) -10,0.841 -10.2,1.041 -10.2,11.6 -8.5,13.3 -6.7,13.3 -5.5,12.1 -2.526,12.1 P5.3@-1.28,10.854 ; P4.3@-1.28,13.454 P5.3@-1.28,10.854 ; P4.2@1.26,13.454 P5.2@1.26,10.854 ; v5(5.3,-3.6) 5.7,-3.2 5.7,6.7 1.546,10.854 P5.2@1.26,10.854 ; P5.3@-1.28,10.854 P5.2@1.26,10.854
pads on no net: ACE1. ACE1.8 B1.10 B2.7 IS1.14 IS1.15 IS1.16 LD1.4
copper on no net:
  other v2: -16,-16 16,-16 -16,16 16,16

## Polygon pours and split planes (outlines as drawn)
GND on Bottom Layer "GND_L04_P003" (solid, remove dead copper, pour order 3): -19.5,19.5 -19.5,-19.5 19.5,-19.5 19.5,19.5
+3V3 on Mid Layer 2 "+3V3_L03_P002" (solid, remove dead copper, pour order 2): -19.5,19.5 -19.5,-19.5 19.5,-19.5 19.5,19.5
GND on Mid Layer 1 "GND_L02_P001" (solid, remove dead copper, pour order 1): -19.5,19.5 -19.5,-19.5 19.5,-19.5 19.5,19.5
GND on Top Layer "GND_L01_P000" (solid, remove dead copper, pour order 0): -19.5,19.5 -19.5,-19.5 19.5,-19.5 19.5,19.5

## Silkscreen, mask and mechanical layers (free items; w line width, h text height)
Top Overlay:
  circle w0.254: c2.8,-7.6 r0.06
  circle w0.254: c-2.8,-10.8 r0.06
  circle w0.254: c-0.7,-11.5 r0.06
  circle w0.254: c1.7,-11.5 r0.06
  lines w0.2: -6.5,-15.4 -6.5,-14.8 ; -3.1,1.7 -3.1,2 -3.1,4.9 ; -3.1,9.5 -3.1,9.2 -3.1,6.2 ; 4.4,1.7 4.4,2 4.4,5 ; 4.4,9.5 4.4,9.2 4.4,6.3 ; -6.5,-14.8 -6.5,-17.3 6.6,-17.3 6.6,-14.8 -6.5,-14.8 ; -3.1,4.9 -2.4,4.9 -2.4,6.2 -3.1,6.2 ; -3.1,4.9 -3.1,6.2 ; 4.4,5 3.7,5 3.7,6.3 4.4,6.3 ; 4.4,5 4.4,6.3
  text "G +5 +5 G" at -5.25,14.724 h1
  text "DOUT" at -8.646,0.754 h1
  text "DIN" at 4.954,0.754 h1
  text "PROG. MODE" at 8.758,-9.5 h1
  text "V2.0" at 2.6,-14.05 h1
  text "ACE LED RING" at -5.9,-16.8 h1
Mechanical 1:
  the board outline again, w0.2